# Altium PCB PCB1.PcbDoc
Units mil, origin at the board's own origin, x right, y up, seen from the top; angles counter-clockwise.
Board outline 6000 x 4000 mil, 2 copper layers (Top Layer, Bottom Layer); 35 components, 0 nets, 130 pads, 21 vias.
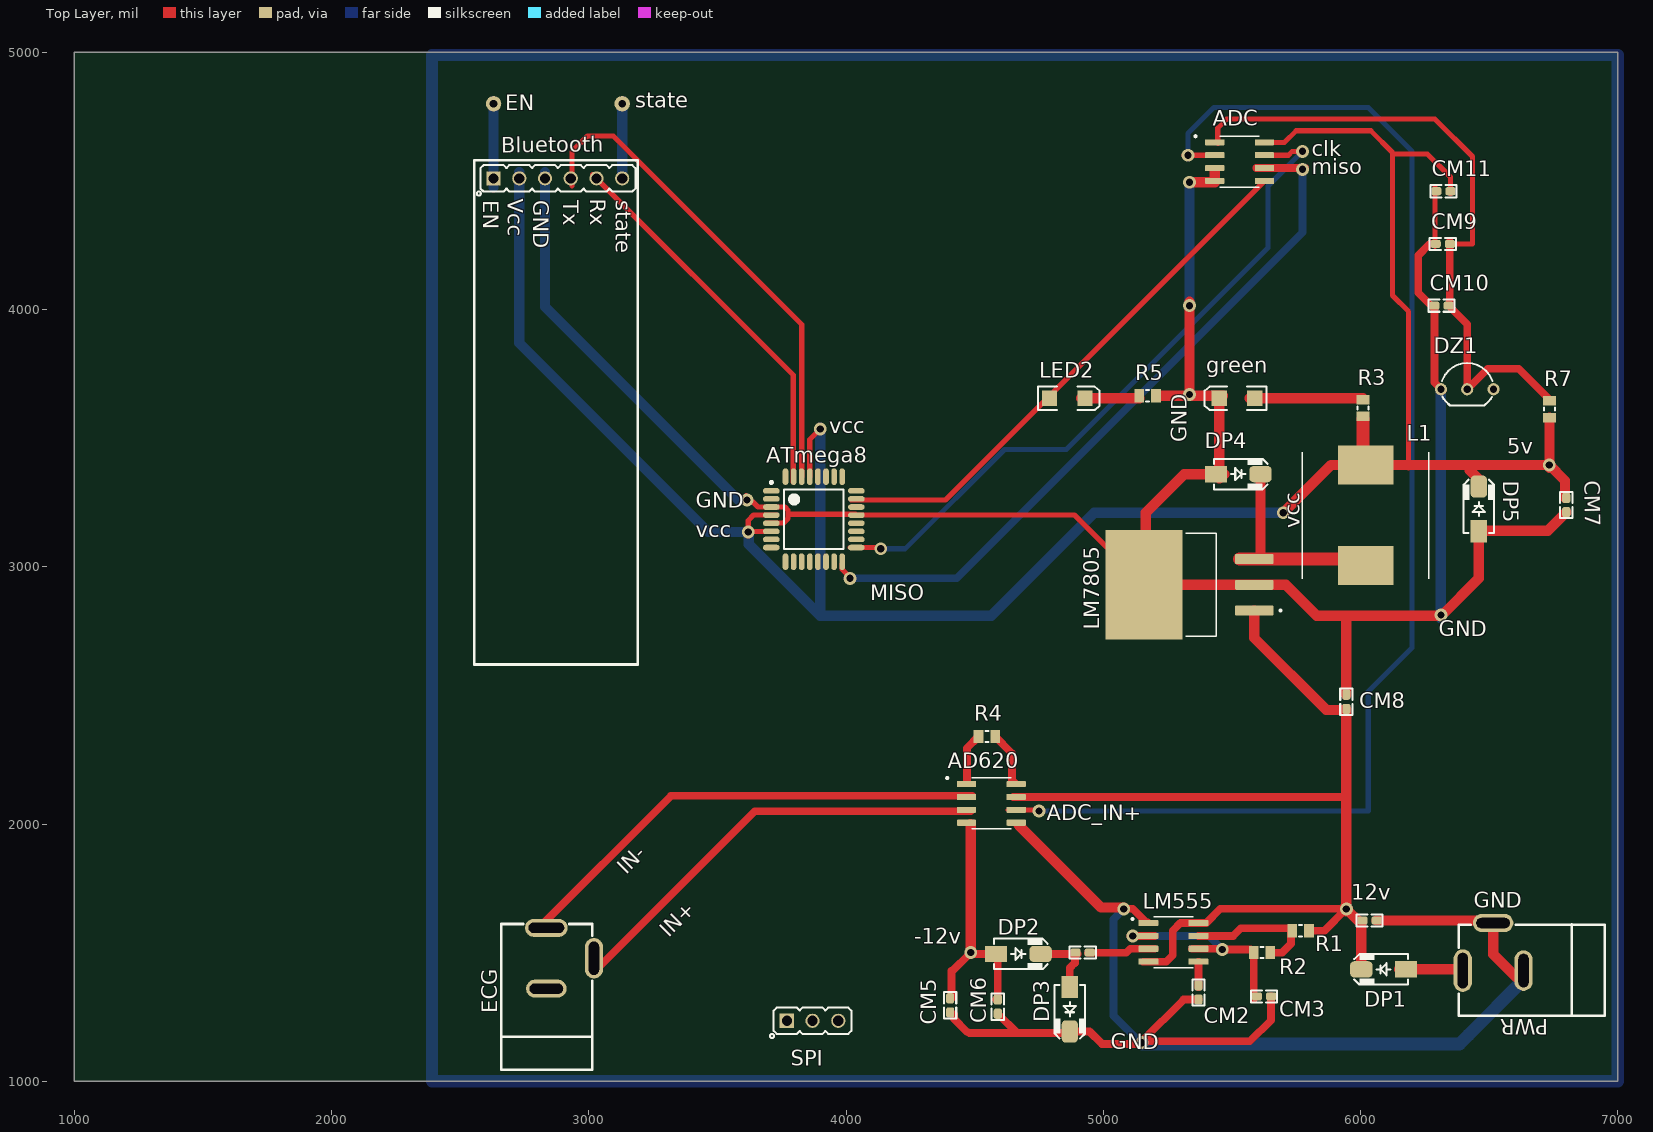
[diagram p0: Top Layer view]
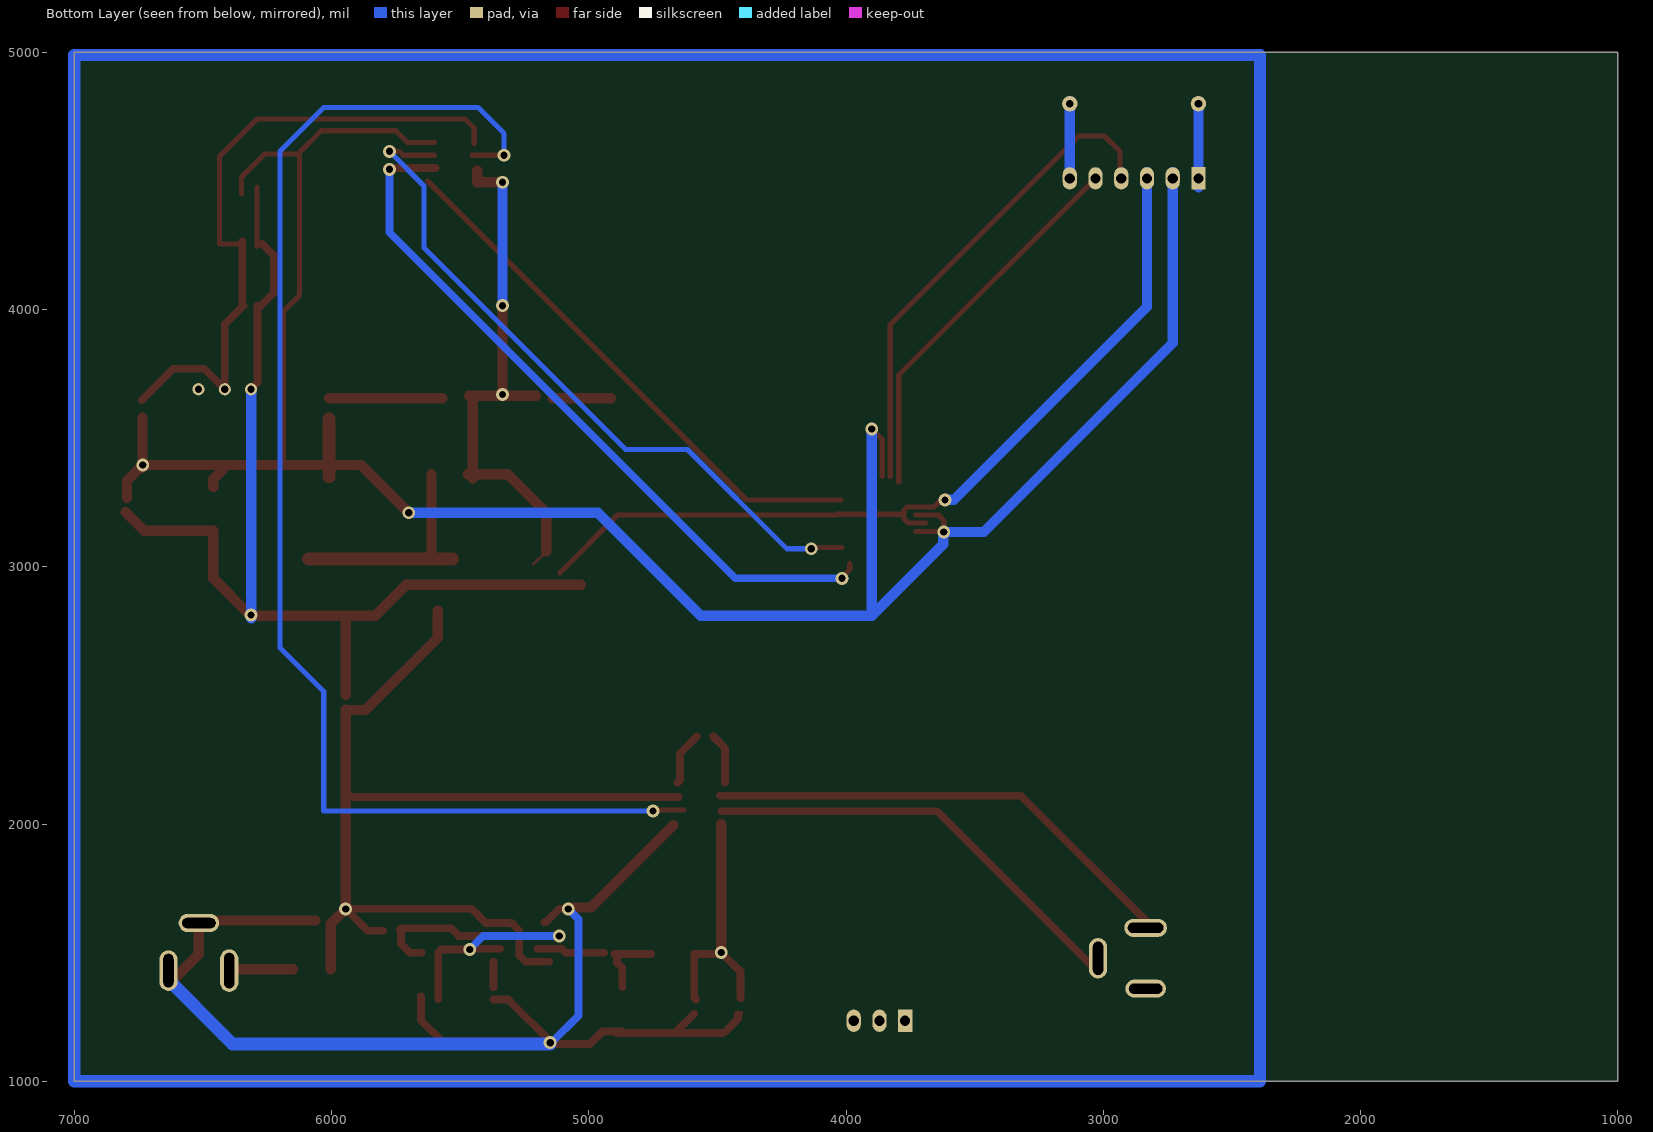
[diagram p1: Bottom Layer view, seen from below]

## Layer stack, top to bottom
Top Solder: solder mask 0.4, Solder Resist, Dk 3.5
Top Layer: signal copper 1.4
Dielectric 1: dielectric 12.6, FR-4, Dk 4.8
Bottom Layer: signal copper 1.4
Bottom Solder: solder mask 0.4, Solder Resist, Dk 3.5

## Board outline
1000,1000 7000,1000 7000,5000 1000,5000

## Design rules (kind name [scope] priority, off if disabled: settings)
Clearance [All] p1: gap=10 ignorepadtopadclearanceinfootprint=FALSE except(0: Arc-Hole Track-Hole SMDPad-Hole THPad-Hole Via-Hole Fill-Hole Poly-Hole Region-Hole Text-Hole)
PolygonConnect [All] p1: connectstyle=Relief reliefconductorwidth=10 reliefentries=4 polygonreliefangle="90 Angle" airgapwidth=10
RoutingVias [All] p1: holewidth=28 width=50 viastyle="Through Hole" minholewidth=28 minwidth=50 maxholewidth=28 maxwidth=50
SolderMaskExpansion [All] p1: expansion=4
Width [All] p1: maxlimit=10 minlimit=10 preferedwidth=10
30 further rules are at their usual default settings.

## Components (designator, comment, footprint, x,y, rotation, side; value= is the part's Value field where it differs from the comment)
AD620 "Comment" SOIC127P600X175-8N 4565,2080 r0 top
ADC "Comment" SOIC127P600X175-8N 5530,4575 r0 top
ATmega8 "Comment" 32A_N 3875,3185 r0 top
Bluetooth "Comment" HDR_1x6 2880,4510 r0 top
CM7 "Comment" 0603C 6800,3240 r90 top
CM9 "Comment" 0603C 6320,4255 r0 top
CM10 "Comment" 0603C 6315,4015 r0 top
CM11 "Comment" 0603C 6322.56,4460 r0 top
DP4 "Comment" 430X270D 5525,3360 r0 top
DP5 "Comment" 430X270D 6460,3225 r90 top
DZ1 "Comment" "TO-92 BENT" 6415,3690 r0 top
green "Comment" "LED SMD 1206" 5520,3655 r180 top
L1 "Comment" INDM1250X1250X600 6020,3200 r270 top
LED2 "Comment" "LED SMD 1206" 4860,3655 r0 top
LM555 "Comment" SOIC127P599X175-8N 5272.76,1540 r0 top
LM7805 "Comment" TO254P1524X483-4N 5335,2930 r180 top
R3 "Comment" "RES 0805 (2012X06L)" 6010,3649.96 r270 top
R4 "Comment" "RES 0805 (2012X06L)" 4515,2340 r0 top
R5 "Comment" "RES 0805 (2012X06L)" 5140,3665 r0 top
R7 "Comment" "RES 0805 (2012X06L)" 6735,3580 r90 top
? "Comment" 0603C 5945,2475 r270 top
? "Comment" 0603C 4405,1295 r270 top
? "Comment" 0603C 4590,1290 r270 top
? "Comment" 430X270D 4870,1280 r270 top
? "Comment" 430X270D 4670,1495 r0 top
? "Comment" 0603C 4920,1500 r180 top
? "Comment" 0603C 5370,1345 r270 top
? "Comment" 0603C 5625,1330 r180 top
? "Comment" "RES 0805 (2012X06L)" 5650,1500 r180 top
? "Comment" "RES 0805 (2012X06L)" 5800,1585 r180 top
? "Comment" 0603C 6035,1625 r0 top
? "Comment" 430X270D 6090,1435 r180 top
? "Comment" HDR_1x3 3870,1235 r0 top
? "3mm jack" DC-005-5A-2.5 2830.13,1338.94 r90 top
? "Comment" DC-005-5A-2.5 6655,1425 r180 top

## Footprints (in the part's own frame and the unit in brackets; to place one, negate y for a bottom-side part, rotate by r counter-clockwise, add the part's x,y. Pads: shape width x height; smd on the part's side, far side on the other; paste and mask are expansions set on the pad)
32A_N [mm] "Thin QFP, 32-Leads, Body 7x7mm, Pitch 0.8mm, IPC Medium Density"
  oval 1.65x0.55 smd mask+0.06: 1(-4.2,2.8) 2(-4.2,2) 3(-4.2,1.2) 4(-4.2,0.4) 5(-4.2,-0.4) 6(-4.2,-1.2) 7(-4.2,-2) 8(-4.2,-2.8) 17(4.2,-2.8) 18(4.2,-2) 19(4.2,-1.2) 20(4.2,-0.4) 21(4.2,0.4) 22(4.2,1.2) 23(4.2,2) 24(4.2,2.8)
  oval 0.55x1.65 smd mask+0.06: 9(-2.8,-4.2) 10(-2,-4.2) 11(-1.2,-4.2) 12(-0.4,-4.2) 13(0.4,-4.2) 14(1.2,-4.2) 15(2,-4.2) 16(2.8,-4.2) 25(2.8,4.2) 26(2,4.2) 27(1.2,4.2) 28(0.4,4.2) 29(-0.4,4.2) 30(-1.2,4.2) 31(-2,4.2) 32(-2.8,4.2)
  silkscreen extent -4.32,-2.95 2.95,3.75, body extent -4.51,-4.51 4.51,4.51, height 1.15
430X270D [mm] "SMA Molded Diode, 2-Leads, Body 4.3x2.7mm"
  rect 2.2x1.6 smd: 1(-2.2,0)
  rrect50% 2.2x1.6 smd: 2(2.2,0)
  silkscreen extent -2.4,-1.5 2.9,1.5, body extent -2.75,-1.4 2.75,1.4, height 2.6
0603C [mm] "1608, 160X80, 1.6x0.8mm (1.75x0.95mm)"
  rrect50% 1x0.8 smd mask+0.075: 1(-0.7,0) 2(0.7,0)
  silkscreen extent -1.3,-0.6 1.3,0.6, body extent -0.8,-0.4 0.8,0.4, height 0.9
DC-005-5A-2.5 [mm] "DC-005-5A-2.5"
  oval 1.8x4.2 hole 1 slot 3.5 at 90 deg: 1(6.535,-0.124)
  oval 1.8x4 hole 1 slot 3.3 at 90 deg: 2(0.535,-0.124)
  oval 4x1.8 hole 1 slot 3.3 at 0 deg: 3(3.535,-4.827)
  silkscreen extent -7.49,-4.68 6.92,4.33
HDR_1x3 [mm] "Header /Jumper box-Designer Abbas Basereh"
  rect 1.4x1.4 / inner rect 1.4x1.4 / far side rect 1.4x2.2 hole 1 mask+0.1: 1(-2.54,0)
  round 1.4 / inner round 1.4 / far side oval 1.4x2.2 hole 1 mask+0.1: 2(0,0) 3(2.54,0)
  silkscreen extent -4.2,-1.7 3.84,1.3, body extent -3.82,-1.46 3.8,1.46, height 8.61
HDR_1x6 [mm] "Header /Jumper box-Designer Abbas Basereh"
  rect 1.4x1.4 / inner rect 1.4x1.4 / far side rect 1.4x2.2 hole 1 mask+0.1: 1(-6.35,0)
  round 1.4 / inner round 1.4 / far side oval 1.4x2.2 hole 1 mask+0.1: 2(-3.81,0) 3(-1.27,0) 4(1.27,0) 5(3.81,0) 6(6.35,0)
  silkscreen extent -8.01,-1.7 7.64,1.3, body extent -7.63,-1.46 7.61,1.46, height 8.61
INDM1250X1250X600 [mm]
  rect 3.85x5.5 smd: 1(-4.975,0) 2(4.975,0)
  silkscreen extent -6.25,-6.25 6.25,6.25
"LED SMD 1206" [mm]
  rect 1.5x1.5 smd: 1(-1.75,0) 2(1.75,0)
  silkscreen extent -2.9,-1.15 3.2,1.15, body extent -1.65,-0.76 1.65,0.69, height 1.36
"RES 0805 (2012X06L)" [mm] "Chip Resistor, 2-Leads, Body 2.0x1.3mm, IPC High Density _ (0.100 W)"
  rect 0.95x1.3 smd: 1(0,0) 2(1.65,0)
  silkscreen extent 0.67,-0.55 0.97,0.55, body extent -0.19,-0.63 1.84,0.64, height 0.6
SOIC127P599X175-8N [mm]
  rrect25% 1.97x0.6 smd: 1(-2.47,1.905) 2(-2.47,0.635) 3(-2.47,-0.635) 4(-2.47,-1.905) 5(2.47,-1.905) 6(2.47,-0.635) 7(2.47,0.635) 8(2.47,1.905)
  silkscreen extent -4.14,-2.52 1.95,2.52
SOIC127P600X175-8N [mm]
  rrect25% 1.9x0.6 smd: 1(-2.455,1.905) 2(-2.455,0.635) 3(-2.455,-0.635) 4(-2.455,-1.905) 5(2.455,-1.905) 6(2.455,-0.635) 7(2.455,0.635) 8(2.455,1.905)
  silkscreen extent -4.45,-2.52 1.95,2.6
TO254P1524X483-4N [mm]
  rrect25% 3.79x0.99 smd: 1(-6.4,2.54) 2(-6.4,0) 3(-6.4,-2.54)
  rect 7.62x10.84 smd paste-6: 4(4.48,0)
  silkscreen extent -9.1,-5.08 0.35,5.08
"TO-92 BENT" [mm] "DESIGNER :ABBAS BASEREH"
  round 1.2 hole 0.7: 1(-2.6,0) 2(0,0) 3(2.6,0)
  silkscreen extent -2.51,-1.6 2.51,2.6, body extent -2.79,-1.59 2.79,2.61, height 10

## Free pads (board coordinates)
  round 60 hole 30: 19(2630,4800) 20(3130,4800)

## Via types
v1: diameter 50, hole 28, Top Layer to Bottom Layer, 21 vias

## Nets (pads, with @x,y where several pads share a name; then routed paths per layer and width w, separated by ;. In a path a pad name is that pad's centre, name@x,y a point inside that pad or via, vN(x,y) a via of type N, cw(c..) or ccw(c..) an arc to the next point about the centre after c; other vN are vias at no path point)
pads on no net: ?.1 ?.2 ?.3 AD620.1 AD620.2 AD620.3 AD620.4 AD620.5 AD620.6 AD620.7 AD620.8 ADC.1 ADC.2 ADC.3 ADC.4 ADC.5 ADC.6 ADC.7 ADC.8 ATmega8.1 ATmega8.2 ATmega8.3 ATmega8.4 ATmega8.5 ATmega8.6 ATmega8.7 ATmega8.8 ATmega8.9 ATmega8.10 ATmega8.11 ATmega8.12 ATmega8.13 ATmega8.14 ATmega8.15 ATmega8.16 ATmega8.17 ATmega8.18 ATmega8.19 ATmega8.20 ATmega8.21 ATmega8.22 ATmega8.23 ATmega8.24 ATmega8.25 ATmega8.26 ATmega8.27 ATmega8.28 ATmega8.29 ATmega8.30 ATmega8.31 ATmega8.32 Bluetooth.1 Bluetooth.2 Bluetooth.3 Bluetooth.4 Bluetooth.5 Bluetooth.6 CM7.1 CM7.2 CM9.1 CM9.2 CM10.1 CM10.2 CM11.1 CM11.2 DP4.1 DP4.2 DP5.1 DP5.2 DZ1.1 DZ1.2 DZ1.3 green.1 green.2 L1.1 L1.2 LED2.1 LED2.2 LM555.1 LM555.2 LM555.3 LM555.4 LM555.5 LM555.6 LM555.7 LM555.8 LM7805.1 LM7805.2 LM7805.3 LM7805.4 R3.1 R3.2 R4.1 R4.2 R5.1 R5.2 R7.1 R7.2
copper on no net: | length 74680.5
  Top Layer w10: 3985.24,3009.82 3985.24,3019.65 ; 4015,3074.76 4015.24,3075 ; 4405,1260 4405,1267.44 ; 5165,3060 5215,3010 ; 5172.76,1617.76 5175.51,1615 ; 5885.87,3395.87 5890.43,3395.87 ; 5940,2810 5945,2805 ; 6225,4205 6225,4210 ; 6270,4255 6292.44,4255
  Top Layer w20: 2935,4480 2935,4615 2995,4675 3095,4675 3827.76,3942.24 3827.76,3507.24 3827.76,3350.35 ; 3015,4525 3795,3745 3795,3330 ; v1@3605,3137.76 3730,3137.76 ; v1@3612.5,3277.5 3657.76,3232.24 3762.76,3232.24 3775,3220 3775,3187.87 3757.13,3170 3690,3170 ; v1(3615,3260) v1@3630,3260 ; v1@3620,3120 3620,3180 3640.75,3200.75 3730,3200.75 ; 3775,3203.94 4037.17,3203.94 ; 3859.25,3350.35 3859.25,3494.25 v1@3907.5,3542.5 ; 3985.24,3009.82 3985.24,2989.76 v1@4022.5,2952.5 ; 4015.24,3075 v1@4150,3075 ; 4020,3260 4386.65,3260 5626.65,4500 ; 4040.35,3200.75 4887.87,3200.75 5111.81,2976.81 ; 4630,2055 v1@4765,2055 ; v1@5315,4600 5453.23,4600 ; 5445,4645 5445,4705 5480,4740 6290,4740 6435,4595 6435,4255 6347.56,4255 ; 5600,4600 5720,4600 5735,4615 v1@5790,4615 ; 5600,4650 5705,4650 5750,4695 6040,4695 6125,4610 ; 6187.07,3385 6187.07,3992.93 6125,4055 6125,4605 6260,4605 6350.12,4514.88 6350.12,4450 ; 6290,4245 6290,4475.75 ; 6603.33,1406.67 6632.5,1377.5
  Top Layer w30: 2795,1585 3320,2110 3495,2110 ; 3022.5,1427.5 3645,2050 4485,2050 ; 3475,2110 4490,2110 ; 4410,1322.56 4410,1430 ; 4410,1425 v1(4485,1500) ; 4420,1260 4420,1242.44 4470,1192.44 ; 4470,2160 4470,2295 4515,2340 ; 4480,1187.44 4890,1187.44 ; v1@4490,1495 4590,1495 4590,1324.17 4583.39,1317.56 ; 4579.96,2340 4645,2274.96 4645,2220.08 4645,2170 4655,2160 ; 4590,1262.44 4665,1187.44 4675,1187.44 ; 4650,2105 5945,2105 ; 4756.61,1495 4830,1495 4900,1495 4857.76,1495 ; 4870,1193.39 4946.61,1193.39 4995,1145 ; 4870,1366.61 4870,1440 4890,1460 4890,1490 ; 4940,1500 5090,1500 5105,1515 5200,1515 ; 5055,1145 4995,1145 ; v1@5070,1670 5115,1670 5167.24,1617.76 5172.76,1617.76 ; v1@5105,1565 5200,1565 ; 5155,1465 5245,1465 5270,1490 5270,1585 5300,1615 5400,1615 5455,1670 v1@5955,1670 ; v1@5160,1145 4995,1145 ; 5345,1515 v1@5470,1515 ; 5370,1317.44 5312.44,1317.44 5150,1155 5570,1155 5652.56,1237.56 5652.56,1330 ; 5370,1365 5370,1465 ; 5370,1565 5505,1565 5535,1595 5725.04,1595 5735.04,1585 ; v1(5462.5,1512.5) 5572.54,1512.5 5585.04,1500 5585.04,1319.96 ; 5595,4550 v1@5785,4550 ; 5650,1500 5695,1500 5730,1535 5730,1595 ; 5800,1585 5860,1585 v1(5945,1670) ; v1@5935,1680 v1@5940,1675 ; 6225,4205 6225,4065 6285,4005 ; 6225,4210 6270,4255 ; 6287.44,4015 6287.44,3717.56 6320,3685 ; 6342.56,4015 6415,3942.56 6415,3690 6495,3770 6615,3770 6737.52,3647.48 ; 6347.56,4015 6347.56,4265
  Top Layer w40: v1(4485,1500) 4485,2000 ; 4670.83,1995.83 4991.65,1675 v1@5080,1675 ; 4915,3655 5140,3655 ; 5030,2930 5640,2930 ; 5165,3060 5165,3210 5315,3360 5470,3360 ; 5204.96,3665 5465,3665 ; v1(5335,3670) v1@5335,4030 ; v1(5335,4495) 5433.35,4495 ; 5433.35,4510 5433.35,4540 ; 5451.1,3343.9 5451.1,3655 ; 5570,3655 6010,3655 ; 5586.97,2830 5586.97,2723.03 5866.45,2443.55 5945,2443.55 ; 5586.97,2930 5710,2930 5830,2810 6315,2810 6460,2955 6460,3140 6727.56,3140 6800,3212.44 ; 5611.61,3030 5611.61,3360 ; v1(5700,3210) 5885.87,3395.87 ; 5890.43,3395.87 6020,3395.87 6354.13,3395.87 v1(6734.13,3395.87) 6795,3335 6795,3267.56 ; v1@5940,1675 6002.79,1612.21 6002.79,1573.9 6003.39,1573.31 6003.39,1435 ; v1@5945,1660 5945,2445 ; 5945,2502.56 5945,2805 ; 6062.56,1625 6515.83,1625 6515.83,1494.17 6545,1465 6603.33,1406.67 ; 6150,1435 6410,1435 ; 6425,3395.87 6425,3375 6460,3340 6460,3311.61 ; v1@6735,3385 6735,3580
  Top Layer w50: 5530,3030 5820,3030 6090,3030 ; 6010,3350 6010,3575
  Bottom Layer w10: 6635,1400 6650,1415 6650,1455
  Bottom Layer w20: v1@4120,3070 4230,3070 4616.25,3456.25 4856.25,3456.25 5640,4240 5640,4480 v1(5775,4615) ; v1(4750,2050) 5470,2050 5870,2050 6030,2050 6030,2515 6200,2685 6200,4615 6030,4785 5430,4785 5330,4685 v1@5330,4585
  Bottom Layer w30: v1@4005,2955 4430,2955 5775,4300 v1@5775,4555 ; v1(5080,1670) 5040,1630 5040,1255 v1@5150,1145 ; v1@5110,1565 5410,1565 v1(5462.5,1512.5)
  Bottom Layer w40: 2630,4475 2630,4810 ; 2730,4535 2730,3870 3465,3135 v1(3620,3135) ; 2830,4535 2830,4010 3580,3260 v1(3615,3260) ; 3130,4510 3130,4810 ; v1@3622.5,3137.5 3622.5,3087.5 3900,2810 ; v1@3900,3540 3900,2810 ; v1(5335,4015) v1(5335,4495) ; v1(5700,3210) 4965,3210 4565,2810 4000,2810 3900,2810 ; v1@6312.64,2800 6312.64,3690
  Bottom Layer w47.24: 2390,1000 2390,4990 7000,4990 7000,1000 2390,1000
  Bottom Layer w50: v1@5150,1145 6062.41,1145 6385,1145 6420,1180 6635,1395 6635,1400
  other v1: 5150,1150 5115,1565 6312.64,2812.36 4015,2955 4135,3070 3900,3535 5775,4545 5330,4600

## Silkscreen, mask and mechanical layers (free items; w line width, h text height)
Top Overlay:
  lines w10: 2555,2620 3190,2620 3190,4580 2555,4580 2555,2620
  text "state" at 3180,4785 h60
  text "EN" at 2675,4775 h60
  text "clk" at 5810,4595 h60
  text "miso" at 5810,4525 h60
  text "Vcc" at 2685,4430 h60 r270
  text "Rx" at 3005,4430 h60 r270
  text "EN" at 2590,4425 h60 r270
  text "GND" at 2785,4425 h60 r270
  text "Tx" at 2900,4425 h60 r270
  text "state" at 3105,4425 h60 r270
  text "vcc" at 3935,3520 h60
  text "GND" at 5325,3485 h60 r90
  text "5v" at 6570,3440 h60
  text "GND" at 3415,3230 h60
  text "vcc" at 5764.09,3150 h60 r90
  text "vcc" at 3415,3115 h60
  text "MISO" at 4095,2870 h60
  text "GND" at 6305,2730 h60
  text "CM8" at 5995,2450 h60
  text "ADC_IN+" at 4780,2015 h60
  text "IN-" at 3145,1800 h60 r45
  text "12v" at 5965,1705 h60
  text "GND" at 6440,1675 h60
  text "DP2" at 4590,1570 h60
  text "IN+" at 3310,1555 h60 r45
  text "-12v" at 4265,1535 h60
  text "R1" at 5825,1505 h60
  text "R2" at 5685,1415 h60
  text "DP1" at 6015,1290 h60
  text "CM3" at 5685,1250 h60
  text "DP3" at 4790,1230 h60 r90
  text "CM6" at 4545,1225 h60 r90
  text "CM2" at 5390,1225 h60
  text "CM5" at 4350,1220 h60 r90
  text "GND" at 5030,1125 h60
  text "SPI" at 3785,1060 h60

## Text inside footprints (layer, text, board x,y; h text height)
?: Top Overlay "ECG" at 2645.13,1263.94 h60 r90
?: Top Overlay "PWR" at 6730,1240 h60 r180